# Altium PCB PCB2.PcbDoc
Units mil, origin at the board's own origin, x right, y up, seen from the top; angles counter-clockwise.
Board outline 3864.8 x 3433.56 mil, 2 copper layers (Top Layer, Bottom Layer); 117 components, 83 nets, 405 pads, 186 vias.
Unrouted connection lines stored in the file: 42.
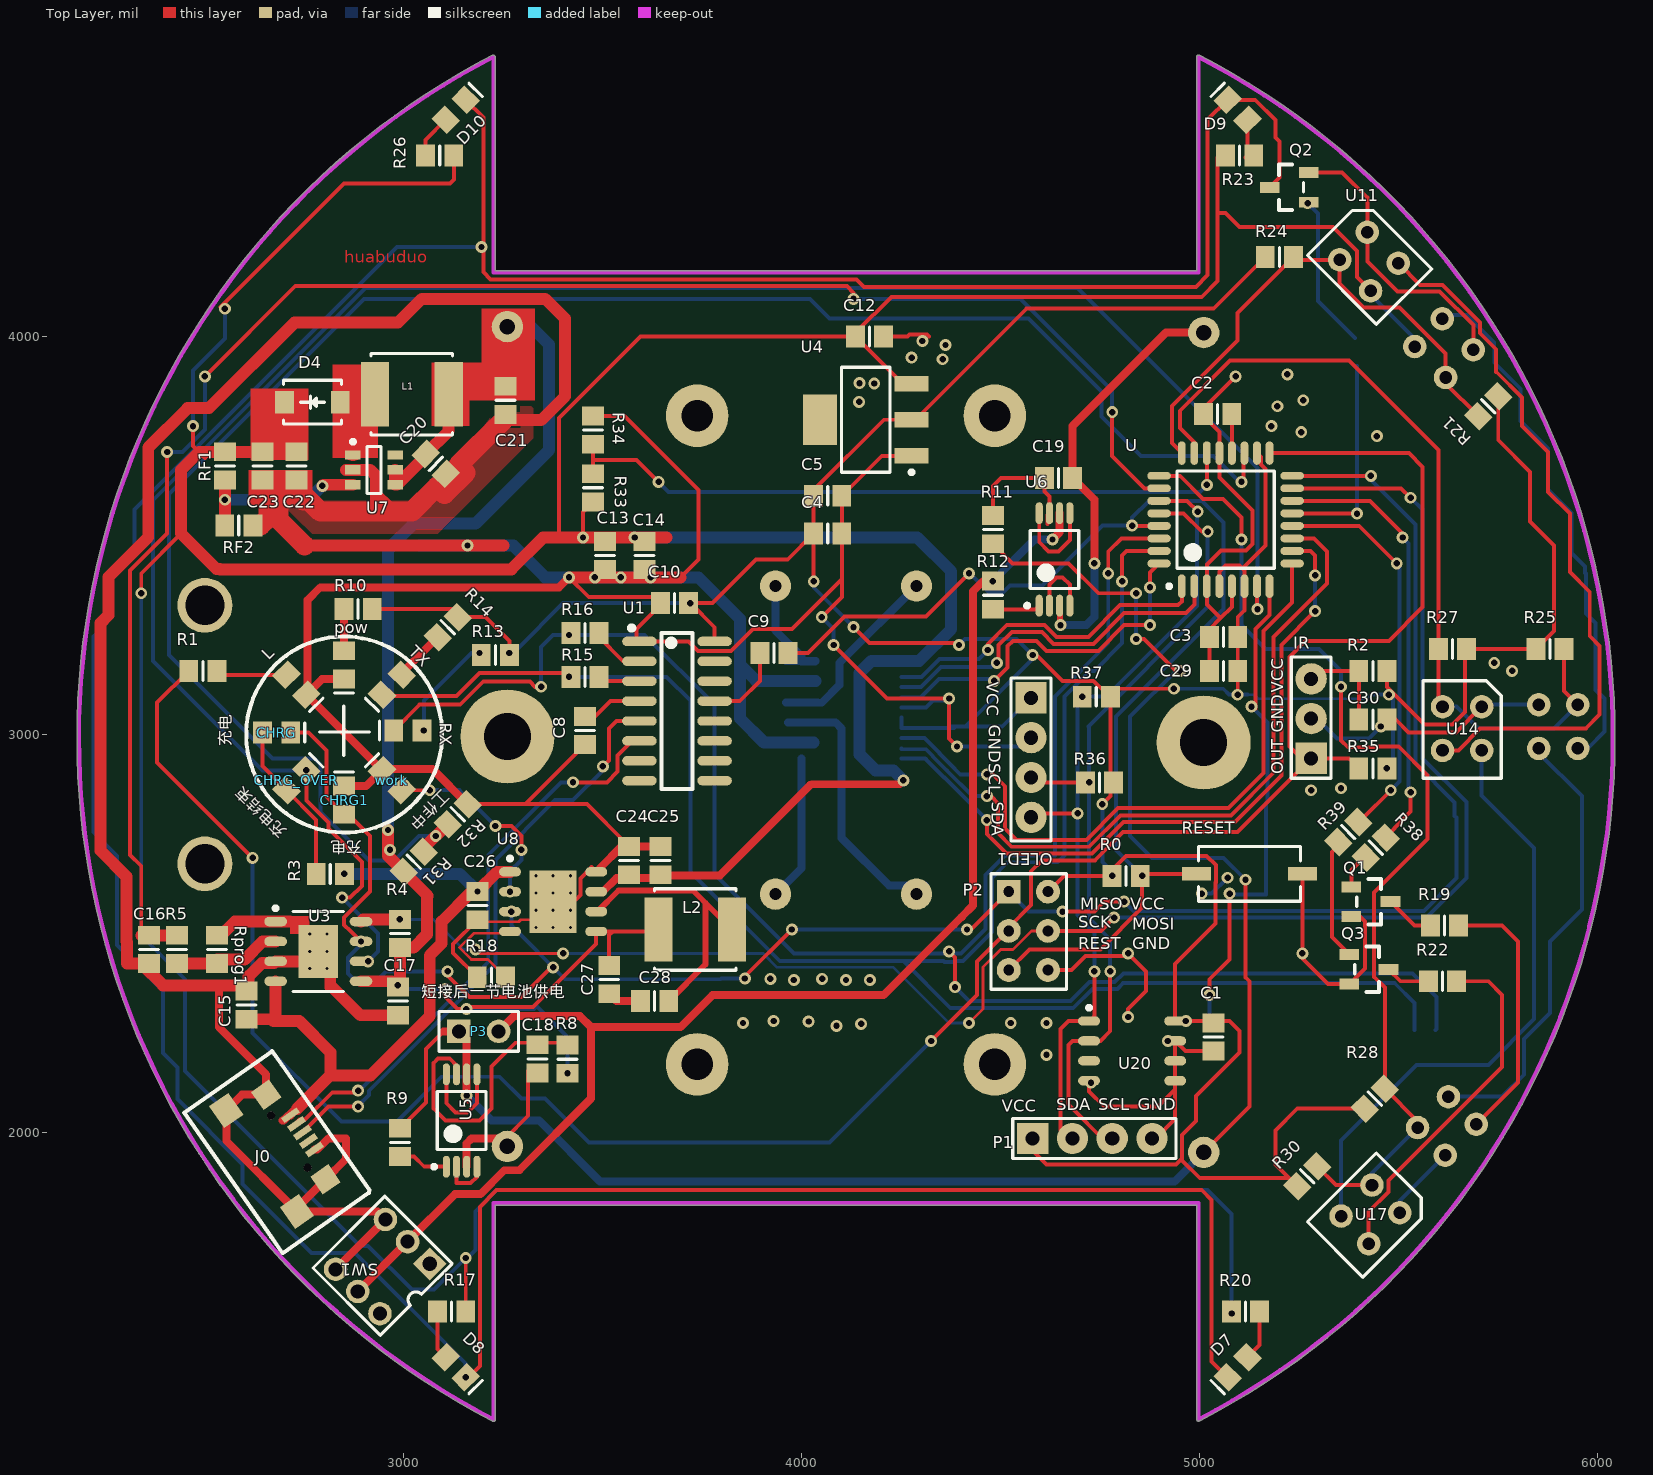
[diagram p0: Top Layer view]
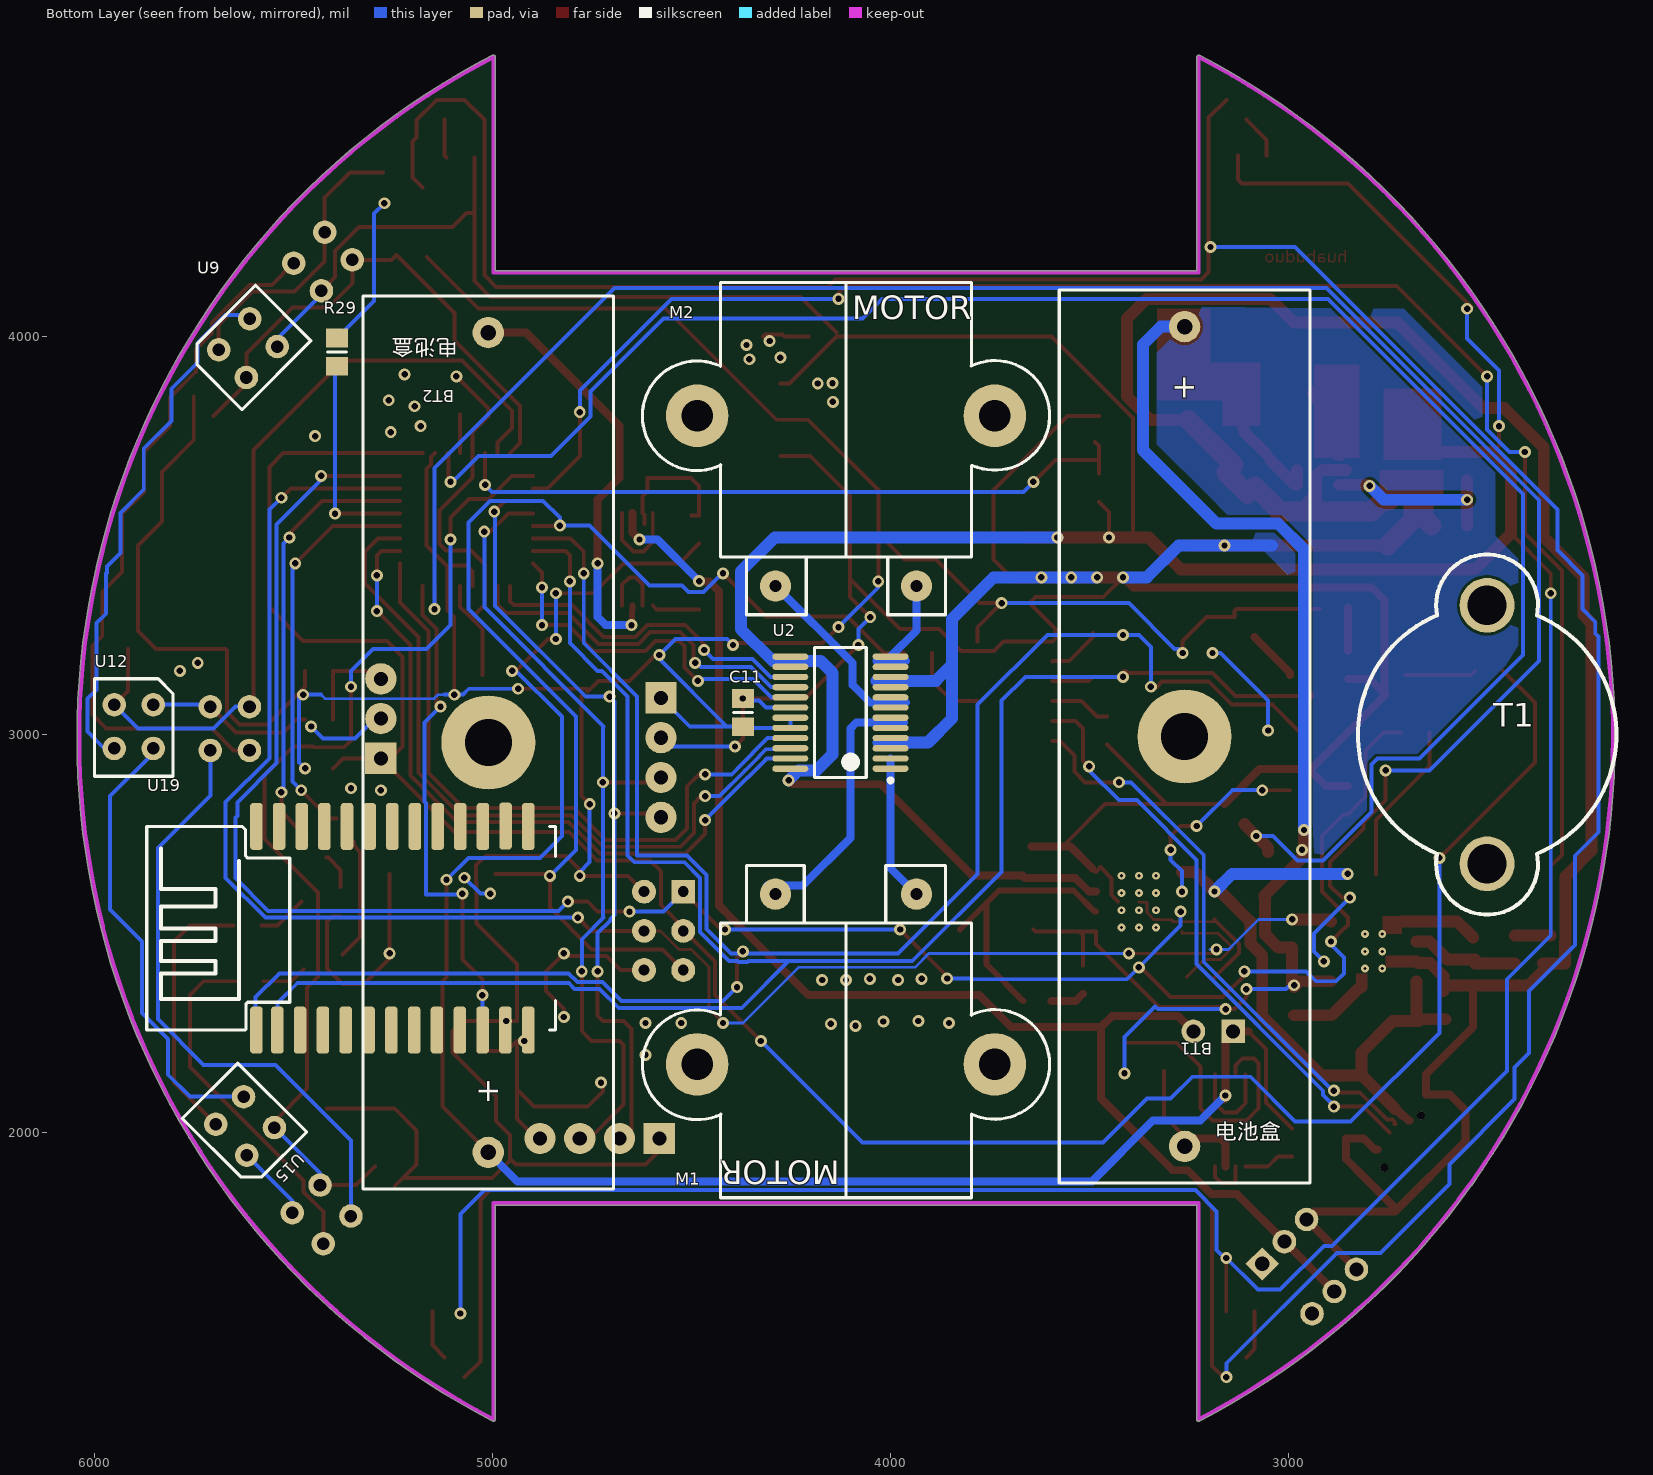
[diagram p1: Bottom Layer view, seen from below]

## Layer stack, top to bottom
Top Solder: solder mask 0.4, Solder Resist, Dk 3.5
Top Layer: signal copper 1.4
Dielectric 1: dielectric 12.6, FR-4, Dk 4.8
Bottom Layer: signal copper 1.4
Bottom Solder: solder mask 0.4, Solder Resist, Dk 3.5

## Board outline
3221.33,1275.58 ccw(c3225,1279) 3229.52,1276.82 3229.52,1276.83 ccw(c3225.13,1279.26) 3230.15,1279.26 ccw(c3225.13,1279.26) 3230.01,1280.41 3230.01,1817.65 4991.98,1817.65 4991.98,1279.69 ccw(c4997,1279.69) 4997.35,1274.69 ccw(c4997.7,1279.69) 5000.01,1275.24 ccw(c4110.98,2991) 6043.39,2991 ccw(c4110.98,2991) 4999.58,4706.98 ccw(c4997.27,4702.53) 4997.15,4707.54 ccw(c4997,4702.53) 4991.98,4702.53 4991.98,4166.02 3230.01,4166.02 3230.01,4701 ccw(c3225,4701) 3229.06,4703.94 ccw(c3224.32,4702.32) 3222.01,4706.77 ccw(c4111,2991)

## Design rules (kind name [scope] priority, off if disabled: settings)
Clearance [All] p1: gap=7
PolygonConnect [All] p1: connectstyle=Relief reliefconductorwidth=10 reliefentries=4 polygonreliefangle="90 Angle" airgapwidth=10
RoutingVias [All] p1: holewidth=28 width=50 viastyle="Through Hole" minholewidth=28 minwidth=50 maxholewidth=28 maxwidth=50
SolderMaskExpansion [All] p1: expansion=4
Width [All] p1: maxlimit=100 minlimit=6 preferedwidth=20
30 further rules are at their usual default settings.

## Components (designator, comment, footprint, x,y, rotation, side; value= is the part's Value field where it differs from the comment)
BT1 "BAT" 电池盒_一节 3260,2995 r270 bottom locked
BT2 "BAT" 电池盒_一节 5010,2980 r90 bottom locked
C1 "Cap" 6-0805_N 5035,2240 r90 top
C2 "Cap" 6-0805_N 5045,3805 r180 top
C3 "Cap" 6-0805_N 5060,3245 r0 top
C4 "Cap Pol3" 6-0805_N 4065,3505 r0 top
C5 "Cap" 6-0805_N 4065,3600 r180 top
C8 "Cap" 6-0805_N 3455,3010 r90 top
C9 "Cap" 6-0805_N 3930,3205 r0 top
C10 "Cap" 6-0805_N 3680,3330 r0 top
C11 "Cap" 6-0805_N 4370,3055 r270 bottom
C12 "Cap Pol3" 6-0805_N 4170,4000 r0 top
C13 "Cap" 6-0805_N 3505,3450 r270 top
C14 "Cap" 6-0805_N 3605,3450 r90 top
C15 "Cap" 6-0805_N 2605,2320 r90 top
C16 "Cap" 6-0805_N 2360,2460 r90 top
C17 "Cap" 6-0805_N 2985,2330 r90 top
C18 "Cap" 6-0805_N 3336,2185 r90 top
C19 "Cap" 6-0805_N 4645,3645 r180 top
C20 "Cap" 6-0805_N 3080,3680 r135 top
C21 "Cap" 6-0805_N 3255,3839.92 r90 top
C22 "Cap" 6-0805_N 2730,3675 r90 top
C23 "Cap" 6-0805_N 2645,3675 r90 top
C24 "Cap" 6-0805_N 3566,2683 r90 top
C25 "Cap" 6-0805_N 3645,2683 r90 top
C26 "Cap" 6-0805_N 3185,2570 r90 top
C27 "Cap" 6-0805_N 3516,2384 r90 top
C28 "16V" 6-0805_N 3630,2330 r0 top
C29 "Cap" 6-0805_N 5060,3160 r0 top
C30 "Cap" 6-0805_N 5435,3037.5 r180 top
CHRG "LED" LED_0805 2680,3005 r0 top
CHRG1 "LED" LED_0805 2850,2835 r90 top
CHRG_OVER "LED" LED_0805 2730,2885 r45 top
D4 "SS34F" "SS34F - DIOM3426X12N" 2770,3835 r0 top
D7 "LED" LED_0805 5095,1410 r225 top
D8 "LED" LED_0805 3130,1410 r315 top
D9 "LED" LED_0805 5095,4570 r135 top
D10 "LED" LED_0805 3130,4570 r45 top
IR "IR" HDR1X3 5280,2940 r90 top (schematic designator U18)
J0 "USB_MINI" MICRO_USB 2745,2000 r305 top locked
L "LED" LED_0805 2730,3125 r315 top
L1 "2.5A" IND_5020 3020,3855 r180 top locked
L2 "2A" IND_5020 3732,2510 r180 top
M1 "Motor" MOTOR1 4111,2146 r180 bottom locked
M2 "Motor" MOTOR1 4111,3826 r0 bottom locked
OLED1 "OLED" HDR1X4 4576,3092 r270 top
P1 "I2C接口" HDR1X4 4580,1985 r0 top
P2 "Header 3X2" HDR2X3 4520,2605 r0 top
P3 "Header 2" HDR1X2 3138,2254 r0 top
pow "LED" LED_0805 2850,3175 r270 top
Q1 "MOSFET-N" SOT-23 5430,2580 r180 top
Q2 "MOSFET-N" SOT-23 5225,4375 r0 top
Q3 "MOSFET-N" SOT-23 5425,2410 r180 top
R0 "Res1" 6-0805_N 4815,2645 r180 top
R1 "Res1" 6-0805_N 2495,3160 r180 top
R2 "Res1" 6-0805_N 5435,3160 r0 top
R3 "Res1" 6-0805_N 2815,2650 r180 top
R4 "Res1" 6-0805_N 2990,2500 r90 top
R5 "Res1" 6-0805_N 2430,2460 r270 top
R8 "Res1" 6-0805_N 3411,2184 r90 top
R9 "Res1" 6-0805_N 2990,1975 r270 top
R10 "Res1" 6-0805_N 2885,3315 r0 top
R11 "Res1" 6-0805_N 4480,3515 r270 top
R12 "Res1" 6-0805_N 4480,3350 r270 top
R13 "Res1" 6-0805_N 3230,3200 r180 top
R14 "Res1" 6-0805_N 3110,3270 r225 top
R15 "Res1" 6-0805_N 3455,3145 r0 top
R16 "Res1" 6-0805_N 3455,3255 r0 top
R17 "Res1" 6-0805_N 3120,1550 r0 top
R18 "Res1" 6-0805_N 3220,2390 r0 top
R19 "Res1" 6-0805_N 5615,2520 r0 top
R20 "Res1" 6-0805_N 5115,1550 r180 top
R21 "Res1" 6-0805_N 5725,3825 r45 top
R22 "Res1" 6-0805_N 5610,2380 r0 top
R23 "Res1" 6-0805_N 5100,4455 r180 top
R24 "Res1" 6-0805_N 5200,4200 r180 top
R25 "Res1" 6-0805_N 5880,3215 r180 top
R26 "Res1" 6-0805_N 3090,4455 r0 top
R27 "Res1" 6-0805_N 5635,3215 r0 top
R28 "Res1" 6-0805_N 5440,2085 r225 top
R29 "Res1" 6-0805_N 5390,3961 r270 bottom
R30 "Res1" 6-0805_N 5270,1890 r225 top
R31 "Res1" 6-0805_N 3025,2680 r225 top
R32 "Res1" 6-0805_N 3135,2800 r225 top
R33 "Res1" 6-0805_N 3475,3620 r270 top
R34 "Res1" 6-0805_N 3475,3765 r270 top
R35 "Res1" 6-0805_N 5435,2915 r0 top
R36 "Res1" 6-0805_N 4748,2879 r0 top
R37 "Res1" 6-0805_N 4740,3095 r0 top
R38 "Res1" 6-0805_N 5442,2716 r45 top
R39 "Res1" 6-0805_N 5373,2755 r45 top
RESET "SW-PB" KEY_SODFL_2-Leads 5125,2650 r180 top
RF1 "Res1" 6-0805_N 2550,3675 r90 top
RF2 "Res1" 6-0805_N 2585,3525 r180 top
Rprog1 "500mA" 6-0805_N 2530,2460 r270 top
RX "LED" LED_0805 3010,3010 r180 top
SW1 "SW" KEY_ZS_5.8*5.8 3065,1670 r225 top
T1 "3PI万向轮" 万向轮 2500,3000 r90 bottom locked
TX "LED" LED_0805 2970,3125 r225 top
U "ATMEL328P" "TQFP 32" 5065,3540 r90 top
U1 "CH340G" SOP16 3710,2935 r0 top
U2 "TB6612FNC" TB6612FNG 4125,3055 r0 bottom
U3 "TC4056A" TC4056A 2785,2455 r0 top
U4 "ASM1117-5V" SOT-223 4135.63,3766 r90 top
U5 "DW03D" TSOP8 3145,2030 r90 top
U6 "DW03D" TSOP8 4635,3440 r90 top
U7 "ME2159AM6G" SOT-23-6 2925,3665 r0 top
U8 "FM9836C" SOP8 3375,2580 r0 top
U9 "ITR" DIP4 5540,3975 r315 bottom
U11 "ITR" DIP4 5429.25,4115 r135 top
U12 "ITR" DIP4 5950,2965 r90 bottom
U14 "ITR" DIP4 5610,2960 r90 top
U15 "ITR" DIP4 5625,2090 r225 bottom
U17 "ITR" DIP4 5355,1790 r45 top
U19 "Bluetooth" HC-08 5195,2520 r90 bottom locked
U20 "LM75AD" "SOP8 - noHotPad" 4830,2205 r0 top
work "LED" LED_0805 2970,2885 r135 top (schematic designator WORK)

## Footprints (in the part's own frame and the unit in brackets; to place one, negate y for a bottom-side part, rotate by r counter-clockwise, add the part's x,y. Pads: shape width x height; smd on the part's side, far side on the other; paste and mask are expansions set on the pad)
6-0805_N [mm] "Chip Resistor, Body 2.0x1.2mm, IPC Medium Density"
  rect 1.2x1.4 smd: 1(-0.9,0) 2(0.9,0)
  silkscreen extent 0,-0.6 0,0.6, body extent -1.07,-0.7 1.07,0.7, height 0.7
DIP4 [mm]
  round 1.5 hole 0.8: 1(0,0) 2(0,-2.5) 3(2.794,-2.5) 4(2.794,0)
  silkscreen extent -1.78,-3.75 4.45,1.25
HC-08 [mm]
  rrect50% 3x0.8 smd: 1(-6.675,10.1) 2(-6.675,8.765) 3(-6.675,7.309) 4(-6.675,5.853) 5(-6.675,4.398) 6(-6.675,2.942) 7(-6.675,1.486) 8(-6.675,0.03) 9(-6.675,-1.426) 10(-6.675,-2.882) 11(-6.675,-4.338) 12(-6.675,-5.794) 13(-6.675,-7.25) 14(6.325,-7.25) 15(6.35,-5.804) 16(6.325,-4.358) 17(6.325,-2.913) 18(6.325,-1.467) 19(6.325,-0.021) 20(6.325,1.425) 21(6.325,2.871) 22(6.325,4.317) 23(6.325,5.762) 24(6.325,7.208) 25(6.325,8.654) 26(6.325,10.1)
  Top Layer pour cut-out: -6.7,17.05 -6.725,17.025 -6.725,6.45 6.375,6.45 6.3,6.525 6.3,17.05
  Bottom Layer pour cut-out: -6.7,17.075 -6.725,17.05 -6.725,6.45 6.3,6.45 6.325,6.475 6.325,17.1
  Top Overlay keep-out lines w0.2: 4.3,10.65 4.45,10.8 6.125,10.8 6.325,11 6.325,17.1 -6.675,17.1 -6.675,10.825 -6.625,10.775 -5.025,10.775 -4.9,10.65 -4.9,7.975 4.3,7.975 4.3,10.675
  silkscreen extent -6.68,-9 6.33,17.1, body extent -6.57,-9.1 6.43,17, height 1.6
HDR1X2 [mm] "Connector; Header; 2 Position"
  rect 1.5x1.5 hole 0.9: 1(0,0)
  round 1.5 hole 0.9: 2(2.54,0)
  silkscreen extent -1.27,-1.27 3.81,1.27
HDR1X3 [mm]
  rect 2x2 hole 0.9: 1(0,0)
  round 2 hole 0.9: 2(2.54,0) 3(5.08,0)
  silkscreen extent -1.27,-1.27 6.48,1.27
HDR1X4 [mm]
  rect 2x2 hole 0.9: 1(0,0)
  round 2 hole 0.9: 2(2.54,0) 3(5.08,0) 4(7.62,0)
  silkscreen extent -1.27,-1.27 9.14,1.27
HDR2X3 [mm]
  rect 1.524x1.524 hole 0.7: 1(0,0)
  round 1.524 hole 0.7: 2(2.5,0) 3(0,-2.5) 4(2.5,-2.5) 5(0,-5) 6(2.5,-5)
  silkscreen extent -1.14,-6.22 3.68,1.14
IND_5020 [mm] "Precision Wire Wound Inductor, 2-Leads, Body 5.00x5.00mm, IPC Medium Density"
  rect 1.8x4.1 smd: 1(-2.35,0) 2(2.35,0)
  silkscreen extent -2.6,-2.6 2.6,2.6, body extent -2.6,-2.5 2.6,2.5, height 2.1
KEY_SODFL_2-Leads [mm] "SODFL, 2-Leads, Body 3.25x8.00mm, IPC Medium Density"
  rect 1.85x0.85 smd: 1(-3.375,0) 2(3.375,0)
  silkscreen extent -3.25,-1.75 3.25,1.75, body extent -4,-1.8 4,1.91, height 2.5
KEY_ZS_5.8*5.8 [mm]
  rect 1.5x1.5 hole 0.9: 1(0,0)
  round 1.5 hole 0.9: 2(0,-2) 3(0,-4) 4(4.5,-4) 5(4.5,-2) 6(4.5,0)
  silkscreen extent -1.02,-5.08 5.46,1
LED_0805 [mm] "Chip LED  Body 2.0x1.2mm, IPC Medium Density"
  rect 1.2x1.4 smd: 1(-0.9,0) 2(0.9,0)
  silkscreen extent 1.8,-0.6 1.8,0.6, body extent -1.07,-0.7 1.07,0.7, height 0.7
MICRO_USB [mm]
  round 0.5 hole 0.5: 0(-2.032,-1.016) 0(2.032,-1.016)
  rect 0.4x1.2 smd: 1(-1.333,0) 2(-0.667,0) 3(0,0) 4(0.667,0) 5(1.333,0)
  rect 1.4x1.4 smd: 6(-3.302,-0.508) 7(3.302,-0.508)
  rect 1.7x1.5 smd: 8(-3.937,-3.175) 9(3.937,-3.175)
  silkscreen extent -5.36,-5.46 5.59,1.4, body extent -4.4,-5.72 4.4,0.02, height 2.71
MOTOR1 [mm]
  round 2 hole 0.762: 1(-4.5,11.5) 2(4.5,11.5)
  round 4 hole 2: 3(-9.5,0.635) 4(9.5,0.635)
  silkscreen extent -13,-7.87 13,13.33
SOP8 [mm] "SOP, 8-Leads, Body 4.90x3.90mm, Pitch 1.27mm, Thermal Pad 4.50x3.40mm, IPC Medium Density"
  oval 1.4x0.6 smd: 1(-2.75,1.905) 2(-2.75,0.635) 3(-2.75,-0.635) 4(-2.75,-1.905) 5(2.75,-1.905) 6(2.75,-0.635) 7(2.75,0.635) 8(2.75,1.905)
  rect 3x4 smd: 9(0,0)
  silkscreen extent -2.87,2.63 -2.62,2.88, body extent -3,-2.55 3,2.55, height 1.65
"SOP8 - noHotPad" [mm] "SOP, 8-Leads, Body 4.90x3.90mm, Pitch 1.27mm, Thermal Pad 4.50x3.40mm, IPC Medium Density"
  oval 1.4x0.6 smd: 1(-2.75,1.905) 2(-2.75,0.635) 3(-2.75,-0.635) 4(-2.75,-1.905) 5(2.75,-1.905) 6(2.75,-0.635) 7(2.75,0.635) 8(2.75,1.905)
  silkscreen extent -2.87,2.63 -2.62,2.88, body extent -3,-2.55 3,2.55, height 1.65
SOP16 [mm] "CH340G"
  oval 2.2x0.6 smd: 1(-3,7.595) 2(-3,6.325) 3(-3,5.055) 4(-3,3.785) 5(-3,2.515) 6(-3,1.245) 7(-3,-0.025) 8(-3,-1.295) 9(1.8,-1.295) 10(1.8,-0.025) 11(1.8,1.245) 12(1.8,2.515) 13(1.8,3.785) 14(1.8,5.055) 15(1.8,6.325) 16(1.8,7.595)
  silkscreen extent -3.65,-1.83 0.4,8.6, body extent -3.68,-1.78 2.51,8.13, height 1.7
SOT-23 [mm]
  rect 1.25x0.7 smd: 1(-1.25,0) 2(1.25,-0.95) 3(1.25,0.95)
  silkscreen extent -0.65,-1.46 0.9,1.46, body extent -1.5,-1.5 1.5,1.5, height 1.3
SOT-23-6 [mm] "SX1308"
  rect 1x0.6 smd: 1(-1.35,0.95) 2(-1.35,0) 3(-1.35,-0.95) 4(1.35,-0.95) 5(1.35,0) 6(1.35,0.95)
  silkscreen extent -1.47,-1.5 0.45,1.92, body extent -0.85,-1.5 0.85,1.5, height 1.1
SOT-223 [mm] "ASM1117,"
  rect 1x2.15 smd: 1(-1.665,-3.56) 2(0.635,-3.56) 3(2.935,-3.56)
  rect 3.25x2.15 smd: 4(0.635,2.29)
  silkscreen extent -2.84,-3.69 3.98,0.91, body extent -2.71,-4.28 3.99,3.02, height 1.7
"SS34F - DIOM3426X12N" [mm] "Molded Diode, 2-Leads, Body 3.45x2.60mm, IPC Medium Density"
  rect 1.2x1.45 smd: 1(-1.778,0) 2(1.778,0)
  silkscreen extent -1.85,-1.4 1.85,1.4, body extent -2.05,-1.4 2.05,1.4, height 1.25
TB6612FNG [mm]
  oval 2.3x0.4 smd: 1(-3.2,3.575) 2(-3.2,2.925) 3(-3.2,2.275) 4(-3.2,1.625) 5(-3.2,0.975) 6(-3.2,0.325) 7(-3.2,-0.325) 8(-3.2,-0.975) 9(-3.2,-1.625) 10(-3.2,-2.275) 11(-3.2,-2.925) 12(-3.2,-3.575) 13(3.2,-3.575) 14(3.2,-2.925) 15(3.2,-2.275) 16(3.2,-1.625) 17(3.2,-0.975) 18(3.2,-0.325) 19(3.2,0.325) 20(3.2,0.975) 21(3.2,1.625) 22(3.2,2.275) 23(3.2,2.925) 24(3.2,3.575)
  silkscreen extent -3.32,-4.15 1.65,4.45
TC4056A [mm] "SOP, 8-Leads, Body 4.90x3.90mm, Pitch 1.27mm, Thermal Pad 3.40x2.51mm, IPC Medium Density"
  oval 1.45x0.6 smd: 1(-2.725,1.905) 2(-2.725,0.635) 3(-2.725,-0.635) 4(-2.725,-1.905) 5(2.725,-1.905) 6(2.725,-0.635) 7(2.725,0.635) 8(2.725,1.905)
  rect 2.51x3.4 smd: 9(0,0)
  silkscreen extent -2.85,-2.55 1.6,2.88, body extent -3,-2.55 3,2.55, height 1.75
"TQFP 32" [mm] "ATMEL 328P"
  oval 1.5x0.5 smd: 1(-4.25,2.8) 2(-4.25,2) 3(-4.25,1.2) 4(-4.25,0.4) 5(-4.25,-0.4) 6(-4.25,-1.2) 7(-4.25,-2) 8(-4.25,-2.8) 17(4.25,-2.8) 18(4.25,-2) 19(4.25,-1.2) 20(4.25,-0.4) 21(4.25,0.4) 22(4.25,1.2) 23(4.25,2) 24(4.25,2.8)
  oval 0.5x1.5 smd: 9(-2.8,-4.25) 10(-2,-4.25) 11(-1.2,-4.25) 12(-0.4,-4.25) 13(0.4,-4.25) 14(1.2,-4.25) 15(2,-4.25) 16(2.8,-4.25) 25(2.8,4.25) 26(2,4.25) 27(1.2,4.25) 28(0.4,4.25) 29(-0.4,4.25) 30(-1.2,4.25) 31(-2,4.25) 32(-2.8,4.25)
  silkscreen extent -4.37,-3.1 3.1,3.72, body extent -4.57,-4.57 4.57,4.57, height 1.62
TSOP8 [mm] "TSOP, 8-Leads, Body 3.00x4.40mm, Pitch 0.65mm, IPC Medium Density"
  oval 1.4x0.45 smd: 1(-2.95,0.975) 2(-2.95,0.325) 3(-2.95,-0.325) 4(-2.95,-0.975) 5(2.95,-0.975) 6(2.95,-0.325) 7(2.95,0.325) 8(2.95,0.975)
  silkscreen extent -3.07,-1.55 1.85,1.87, body extent -3.2,-1.55 3.2,1.55, height 1.1
万向轮 [mm]
  round 3.5 hole 2.5: 1(-8.25,0) 2(8.25,0)
  silkscreen extent -11.5,-8.25 11.5,8.25
电池盒_一节 [mm]
  round 6 hole 3: 0(0,0)
  round 2 hole 1: 1(-26.162,0) 2(26.162,0)
  silkscreen extent -28.5,-8 28.5,8

## Part data
C1 C2 C3 C5 C8 C9 C10 C11 C13 C14 C15 C16 C17 C18 C19 C20 C21 C22 C23 C24 C25 C26 C27 C29 C30: "Capacitor"
C4 C12: "Polarized Capacitor (Surface Mount)"
C28: library part Cap, "Capacitor"
D4: "Schottky Diode"
IR: library part 红外一体化接收头
J0: "usb"
L1 L2: library part Inductor, "Inductor"
OLED1: "I2C OLED"
P1: library part "Header 4", "Header, 4-Pin"
P2: "Header, 3-Pin, Dual row"
P3: "Header, 2-Pin"
Q1 Q2 Q3: "N-Channel MOSFET"
R0 R1 R2 R3 R4 R5 R8 R9 R10 R11 R12 R13 R14 R15 R16 R17 R18 R19 R20 R21 R22 R23 R24 R25 R26 R27 R28 R29 R30 R31 R32 R33 R34 R35 R36 R37 R38 R39 RF1 RF2: "Resistor"
RESET: "Switch"
Rprog1: library part Res1, "Resistor"
SW1: "自锁开关"
U: library part ATMEL-328P
U3: "1A线性充电芯片"
U4: "ASM117"
U5 U6: "锂电池保护芯片"
U7: "锂电池升压芯片"
U9 U11 U12 U14 U15 U17: library part ITR20001/T
U19: "蓝牙模块"
U20: "温度传感器"

## Via types
v1: diameter 30, hole 16, Top Layer to Bottom Layer, 168 vias
v2: diameter 19.68, hole 7.87, Top Layer to Bottom Layer, 18 vias

## Nets (pads, with @x,y where several pads share a name; then routed paths per layer and width w, separated by ;. In a path a pad name is that pad's centre, name@x,y a point inside that pad or via, vN(x,y) a via of type N, cw(c..) or ccw(c..) an arc to the next point about the centre after c; other vN are vias at no path point)
+5: C1.2 C3.2 C4.1 C5.2 C10.2 C11.2 C29.2 OLED1.1 P1.1 P2.2 R0.2 R2.2 R10.2 R13.1 R14.1 R21.2 R24.2 R25.2 R27.2 R28.2 R30.2 R35.2 R36.2 R37.2 U1.16 U2.19 U2.20 U4.2 U19.12 U20.8 U.4 U.6 U.18 | length 10669.9
  Top Layer w10: R10.2 3130,3315 3135.05,3309.95 R14.1 3204.95,3295.05 3265.43,3234.57 R13.1 ; U1.16 3780.87,3269.57 3720.43,3330 3775,3330 3885,3440 3964.57,3440 C4.1 ; v1(4030,3385) 4029.57,3385.43 C4.1 ; v1(4130,3270) 4170,3230 4390,3230 v1(4395,3225) ; P1.1 4580,1955 4615,1920 4940,1920 4955,1935 4955,1994.02 4990,2029.02 4990,2091.42 5100,2201.42 5100,2255 5075,2280 v1(4965,2280) U20.8 4938.27,2423.27 5040,2525 5040,2627.75 5040.54,2628.3 5040.54,2671.7 5017.25,2695 4815,2695 4780,2660 v1(4780,2645) ; v1(4580,3200) 4580,3210 4655.44,3134.56 4733.16,3134.56 4760,3107.72 4760,3115 v1(4935,3115) ; P2.2 4658.43,2645 R0.2 ; v1(4755,2825) 4776,2846 4776,2972 ; 4775.43,2975 R37.2 ; 4955,1930 5000,1885 5224.89,1885 R30.2 5189.89,1920 5189.89,2004.89 5244.94,2059.94 R28.2 ; U.4 5049.25,3409.25 5065,3425 5100,3425 5112.24,3412.76 ; v1(5095,3100) 5095.43,3100.43 C29.2 C3.2 5095.43,3295.43 5112.24,3312.24 U.6 5112.24,3412.76 ; U.18 5153.39,3697.67 5153.39,3678.59 5165,3666.98 5165,3475 5112.24,3422.24 5112.24,3412.76 ; R24.2 5034.57,4070 4565,4070 4286,3791 U4.2 4206,3791 4029.57,3614.57 C5.2 C4.1 ; R2.2@5470,3160 5470,3120 5565,3025 5635,3025 5666.9,3056.9 5666.9,3211.46 R27.2 R25.2 5890,3260.43 5890,3475 5830,3535 5830,3660 5750.05,3739.95 R21.2
  Bottom Layer w7: 5120,3100 5136.06,3100 5145.93,3090.13 5420.13,3090.13 5430,3100
  Bottom Layer w10: v1(3265,3205) 3275,3215 3285,3215 3400,3330 v1(3720,3330) ; v1(4030,3385) 4030,3370 v1(4130,3270) ; U2.19 U2.20 C11.2@4382.05,3016.61 ; C11.2 4409.57,3019.57 ; v1(4395,3225) 4410,3240 4540,3240 v1(4580,3200) 4580,3190 4409.57,3019.57 ; OLED1.1 4503.57,3019.57 4409.57,3019.57 ; v1(4755,2825) 4755,2680 v1@4780,2655 ; v1(4935,3115) 4935,3119 4939,3115 5059,3115 5074,3100 v1(5095,3100) 5120,3100 ; 5430,3100 5485,3100 5485,2930 v1(5470,2915)
  other v1: 5475,3100
A0: R25.1 R27.1 U12.4 U14.4 U.23 | length 2107.9
  Top Layer w10: U.23 4986.26,3733.74 4950,3770 4950,3813.58 5076.42,3940 5375,3940 5599.57,3715.43 R27.1 5599.57,3080.43 U14.4 ; R25.1 5915.43,3109.57 U12.4
  Bottom Layer w10: U14.4 5645,3070 5700,3015 5890,3015 U12.4
A1: R21.1 R24.1 U9.4 U11.4 U.24 | length 1335.1
  Top Layer w10: U.24 4930,3732.09 4930,3825 5095,3990 5095,4059.57 R24.1 ; R24.1@5240.43,4205 5252.65,4192.78 U11.4 5351.46,4134.05 5412.05,4073.47 5501.53,4073.47 5617.78,3957.22 U9.4 5617.78,3882.11 R21.1
A2: R28.1 R30.1 U15.4 U17.4 U.25 | length 2579.7
  Top Layer w10: U.25 4949.76,3650.24 5008,3592 5058,3592 5105,3545 v1(5105,3490) ; R30.1 5342.33,1867.78 U17.4 ; v1(5355,3120) 5355,2985 5372,2968 5448,2968 5450,2970 5500,2970 5572.5,2897.5 5572.5,2737.5 5437.61,2602.61 5437.61,2391.25 5465.06,2363.8 R28.1 5547.22,2027.89 U15.4
  Bottom Layer w10: v1(5105,3490) 5105,3275 5165,3215 5300,3215 5355,3160 v1@5355,3125 ; U17.4 5432.78,1897.78 U15.4
A3: C16.2 R5.1 U.26 | length 4413.9
  Top Layer w10: C16.2@2340,2495.43 2340,2670 2312.27,2697.73 2312.27,3412.27 2405,3505 v1(2405,3710) ; v1(2500,3900) 2727,4127 4113,4127 4130,4110 v1(4130,4095) ; v1(4780,3810) 4780,3700 4861.26,3618.74 U.26
  Top Layer w30: C16.2@2340,2495.43 R5.1
  Bottom Layer w10: v1(2405,3710) 2443.18,3710 2500,3766.82 v1(2500,3900) ; v1(4130,4095) 4550,4095 4780,3865 v1(4780,3810)
A4: OLED1.4 P1.2 R37.1 U20.1 U.27 | length 2081.3
  Top Layer w10: OLED1.4 4586,2802 v1(4693,2802) ; P1.2@4680,1975 4650,2005 4650,2260 4670,2280 U20.1 4735,2293.27 v1(4735,2405) ; R37.1@4694,3095 v1(4705,3095) ; U.27 4967.76,3587.24 v1(4995,3560)
  Bottom Layer w10: v1(4735,2405) 4735,2500.96 4703,2532.96 4703,2537 4693,2547 v1(4693,2802) 4693,3083 v1(4705,3095) 4765,3095 4993,3323 4993,3551.18 4995,3553.18 v1(4995,3560)
A5: OLED1.3 P1.3 R36.1 U20.2 U.28 | length 2103.3
  Top Layer w10: OLED1.3 4588,2880 v1(4722,2880) ; P1.3@4767.5,1972.5 4670,2070 4670,2220 4680,2230 U20.2 4750,2230 4775,2255 v1(4775,2405) ; U.28 4959.25,3555.75 5005,3510 v1(5020,3510)
  Bottom Layer w10: v1(4775,2405) 4775,2485 4720,2540 4722,2542 v1(4722,2880) 4722,3018 4720,3020 5020,3320 v1(5020,3510)
A6: R31.1 R32.2 U.19 | length 4685.5
  Top Layer w10: v1@5110,3630 5110,3705.08 U.19
  Top Layer w30: R31.1 3050.05,2715.05 R32.2
  Bottom Layer w10: v1(3080,2745) 3038.18,2745 2976.18,2683 2912,2683 2790,2805 2790,2925 2775,2940 2670,2940 2410,3200 2410,3604.69 2900.31,4095 4020,4095 4070,4045 4570,4045 4753,3862 4753,3798.82 4851.82,3700 5035,3700 v1@5105,3630
  other v1: 5105,3635
A7: R33.1 R34.2 U.22 | length 1756.6
  Top Layer w10: R33.1 3475,3690 ; R34.2@3485,3734.57 3475,3724.57 3475,3690 ; v1(3640,3635) 3585,3690 3475,3690 ; U.22 v1(5017.76,3627.24) v1@5025,3620
  Bottom Layer w10: v1(3640,3635) 3665,3610 5000.51,3610 v1(5017.76,3627.24)
AN1: U2.21 U.9 | length 1704
  Top Layer w10: v1(4465,2900) 4480,2900 4510,2870 4510,2764.29 4539.29,2735 4715,2735 4795,2815 5072,2815 5160,2903 5160,3260 5232.32,3332.32 U.9
  Bottom Layer w10: U2.21 4308.02,2991.02 4346,2953.04 4346,2951.77 4371.77,2926 4372.08,2926 4398.08,2900 v1(4465,2900)
AN2: U2.22 U.11 | length 1872.8
  Top Layer w10: v1(4465,2845) 4475,2845 4493,2827 4493,2752 4527,2718 4722.04,2718 4801.04,2797 5078.04,2797 5185,2903.96 5185,3245 5320,3380 5320,3460 5287.24,3492.76 U.11
  Bottom Layer w10: U2.22 4250.98,2963 4312,2963 4329,2946 4329,2944.73 4364.73,2909 4365.04,2909 4429.04,2845 v1(4465,2845)
AREF: C2.1 U.20 | length 97.4
  Top Layer w10: U.20 C2.1@5080.75,3804.68
BAT_4.2V: BT1.1 C17.2 C20.2 C21.2 C27.2 L1.1 L2.2 R4.1 R8.1 R31.2 U3.5 U7.4 U7.5 U8.5 | length 3963.2
  Top Layer w10: C20.2@3045.43,3690.43 C20.2@3057.5,3702.5 ; v1(3105,2360) 3105,2340 3135,2310 v1(3157,2310) v1@3155,2310 ; v1@3150,2305 3160,2315 3325,2315 3483.27,2473.27 U8.5 3525,2505 ; C27.2 3516,2496 3525,2505 ; L2.2 3634.48,2505 3525,2505
  Top Layer w20: BT1.1 3300,3985 3300,3865.43
  Top Layer w30: U3.5 2970.43,2380 C17.2 2990,2370.43 R4.1 3024.57,2464.57 3058,2498 3058,2590.76 3060,2592.76 3060,2594.89 R31.2 2960,2694.89 v1(2960,2760) ; U7.5 U7.4 2982.6,3627.6 C20.2@3045.43,3690.43 ; C20.2 3112.52,3762.63 L1.1
  Bottom Layer w10: v1(2985,2370) 2990,2375 3005,2360 v1(3105,2360) ; v1(3157,2310) 3327,2310 3334,2317 3411,2240 v1(3411,2148.57)
  Bottom Layer w30: v1(2960,2760) 2960,3465 3025,3530 3180,3530 3365,3715 3365,3980 3320,4025 BT1.1
  other v1: 2965,2710
BN1: U2.17 U.32 | length 923.7
  Top Layer w10: v1(4483.18,3135) 4517,3168.82 4517,3222 4530.18,3235.18 4589.82,3235.18 4615,3210 4745,3210 4810,3275 4865,3275 v1@4875,3285 ; v1(4875,3370) 4875,3407.09 U.32
  Bottom Layer w10: U2.17 4298.39,3093.39 4345,3140 4478.18,3140 v1(4483.18,3135) ; v1(4875,3275) v1(4875,3370)
BN2: U2.16 U.2 | length 913.8
  Top Layer w10: v1(4490,3180) 4494.5,3184.5 4494.5,3224.5 4528,3258 4602.96,3258 4632.96,3228 4733,3228 4810,3305 4965,3305 4986.26,3326.26 U.2
  Bottom Layer w10: U2.16 4298.98,3118.98 4350,3170 4475,3170 4480,3175 v1@4480,3185
BOOST_6V: C12.1 C13.1 C14.2 C22.2 C23.2 C24.1 C25.1 D4.1 R17.2 R20.2 R23.2 R26.2 R33.2 RF1.2 U2.13 U2.14 U2.24 U4.3 U8.7 U9.1 U11.1 | length 13592.7
  Top Layer w10: v1(2340,3355) 2340,3405 2440,3505 ; v1(2470,3775) 2470,3725 2500,3695 ; v1@2538.79,4073.79 2850,4385 3115.43,4385 3125.43,4395 R26.2 ; R17.2 v1(3155.43,1684.57) ; 3390,3495 3390,3795 3595,4000 C12.1 4253.02,3881.55 U4.3 ; v1(3450,3495) 3450,3559.57 R33.2 ; C12.1@4135,4010 4225,4100 5005,4100 5044.57,4139.57 5044.57,4310 ; R23.2@5044.57,4450 5044.57,4310 ; U11.1 5395,4149.25 5395,4215 5335,4275 5100,4275 5065,4310 5044.57,4310
  Top Layer w20: U8.7 3500,2605 3534,2639 3661,2639 3668,2646 3794,2646 4021,2873 ; 4025,2875 4245,2875 v1(4255,2885)
  Top Layer w30: C23.2 RF1.2 2485.43,3710.43 2440,3665 2440,3505 2529.3,3415.7 2537.65,3415.7 2538.35,3415 3270,3415 3350,3495 3390,3495 ; 3395,3495 v1(3450,3495) v1(3580,3495) 3660,3495
  Bottom Layer w10: v1(2340,3355) 2340,2495 2450,2385 2450,2155 2890,1715 2910,1715 3020,1605 3075.87,1605 v1(3155.43,1684.57) 3155.43,1680.43 3180,1705 3180,1801.71 3233.29,1855 5020,1855 5080,1795 v1(5080,1545) ; v1(2470,3775) 2470,3915 2550,3995 v1(2550,4070) ; U11.1 5429.25,4105.75 U9.1@5550,3985
  Bottom Layer w30: v1(3580,3495) 4290,3495 4375,3410 4375,3265 4295,3185 4175,3185 4145,3155 4145,2950 4185.03,2909.97 4230.03,2909.97 v1(4255,2885)
CHRG: CHRG1.1 CHRG.2 P2.1 U3.7 U8.3 U.16 | length 5314.3
  Top Layer w10: CHRG.2 2760,3005 2805,2960 2805,2844.57 CHRG1.1 2860.43,2799.57 2915,2745 2915,2605 2850,2540 2850,2521.88 2865.69,2506.19 2866.09,2506.19 v1(2892.28,2480) ; v1(3110,2405) 3110,2395 3165,2340 3295,2340 3370,2415 v1(3375,2415) ; v1(3857,2387) 3857,2388 3855,2390 v1(3975,2510) ; v1(4415,2510) 4425,2510 P2.1 ; v1(4655,2555) 4735,2555 4760,2580 v1(4810,2580) ; U.16 v1@5430,3650.24
  Bottom Layer w10: v1(2892.28,2480) 2892.28,2472.28 2860,2440 2860,2400 2880,2380 2930,2380 2955,2405 v1(3110,2405) v1@3115,2405 ; v1(3270,2555) 3270,2520 3405,2385 3796,2385 3798,2387 v1(3857,2387) ; v1(3975,2510) v1(4415,2510) ; P2.1 4570,2555 v1(4655,2555) ; v1(4810,2580) 4833,2557 5562.96,2557 5645,2639.04 5645,2790.96 5640.48,2795.48 5640.48,2829.52 5542,2928 5542,3528 5430,3640 v1(5430,3650)
CHRG_EN: P2.4 R4.2 U3.8 U.15 | length 4437.5
  Top Layer w7: v1(3180,2460) 3190,2450 v1(3400,2450) ; v1(4420,2275) 4455.5,2310.5 4455.5,2415.5 4500,2460 4530.7,2460 4577.28,2506.57 P2.4
  Top Layer w10: P2.4 4751.57,2506.57 v1(4785,2540) ; U.15 5506.26,3618.74 v1(5530,3595)
  Top Layer w30: U3.8 2897.72,2535.43 v1(2990,2535.43)
  Bottom Layer w7: v1(2990,2535.43) 3074.57,2535.43 3150,2460 v1(3180,2460) 3196.5,2460 ; v1(3400,2450) 3903.08,2450 3938.08,2415 4230,2415 4370,2275 v1(4420,2275)
  Bottom Layer w10: v1(4785,2540) 5570,2540 5670,2640 5670,2830 5560,2940 5560,3565 v1(5530,3595)
D0/RXD: R16.1 RX.2 U19.1 U.30 | length 5011.5
  Top Layer w10: RX.2 2974.57,3010.43 3039,3074.86 3140.98,3074.86 3199.44,3133.32 3316.68,3133.32 3330,3120 v1(3345,3120) ; v1(4370,2455) 4385,2440 v1(4385,2365) ; v1(4770,3405) 4770,3460 4802.76,3492.76 U.30
  Bottom Layer w10: v1(3345,3120) 3345,3220 3375,3250 v1(3415,3250) 3605,3250 3780,3075 3780,2650 3980,2450 4400,2450 4461,2511 4461,2647.01 4510,2696.01 4636.01,2696.01 4636.01,3096.01 4770,3230 v1(4770,3405) ; v1(4385,2365) 4420,2330 4675,2330 4723.41,2378.41 ; 4723.82,2378 4786.18,2378 4808.18,2400 5535,2400 5595,2340 5595,2259.57 U19.1
D1/TXD: R15.1 TX.2 U19.2 U.31 | length 4855.7
  Top Layer w10: TX.2@2944.95,3096.86 3131.86,3096.86 3190,3155 R15.1@3409.57,3155 ; v1(4805,3385) 4805,3450 4816.26,3461.26 U.31
  Top Layer w20: TX.2@2944.95,3096.86 TX.2 ; R15.1@3409.57,3155 R15.1
  Bottom Layer w10: v1(3415,3145) 3660,3145 3720,3085 3720,2655 3944.5,2430.5 4356.32,2430.5 4358.82,2428 4381.18,2428 4383.68,2430.5 4404.54,2430.5 4478,2503.96 4478,2639.97 4517.04,2679.01 4643.05,2679.01 4660,2695.96 4660,3095.96 4724.04,3160 4735,3160 4805,3230 v1(4805,3385) ; 4255.48,2430.48 4372.96,2313 4682.04,2313 4730.04,2361 4793.23,2361 4807.23,2375 5490,2375 5540.09,2324.91 U19.2
D3: U2.15 U.1 | length 854.1
  Top Layer w10: v1(4467.5,3212.5) 4467.5,3227.5 4515,3275 4610,3275 4640,3245 4720,3245 4800,3325 4945,3325 4954.76,3334.76 U.1
  Bottom Layer w10: U2.15 4300.53,3144.57 4345.96,3190 4445,3190 v1(4467.5,3212.5)
D6: U2.23 U.10 | length 1805.4
  Top Layer w10: v1(4465,2785) 4465,2750 4514,2701 4729.08,2701 4808.08,2780 5088,2780 5205,2897 5205,3225 v1(5290,3310) ; U.10 5278.74,3461.26 5290,3450 v1(5290,3400)
  Bottom Layer w10: U2.23 4310.16,2939.84 4312,2938 4312,2937.69 4357.69,2892 4358,2892 v1(4465,2785) ; v1(5290,3310) v1(5290,3400)
D8: R39.2 U.12 | length 1002.1
  Top Layer w10: U.12 5400.75,3524.25 v1(5495,3430) ; R39.2@5391.05,2789.06 5409.06,2789.06 v1(5480,2860)
  Bottom Layer w10: v1(5480,2860) 5502,2882 5502,3423 v1(5495,3430)
D9: R29.2 U.13 | length 543.6
  Top Layer w10: U.13 5394.25,3555.75 v1(5395,3555) v1@5385,3555
  Bottom Layer w10: v1(5395,3555) R29.2@5395,3925.57
D10: R38.2 U.14 | length 1110
  Top Layer w10: U.14 5427.76,3587.24 5510,3505 v1(5510,3495) ; R38.2 5489.5,2763.5 5489.5,2765.5 5530,2806 v1(5530,2855)
  Bottom Layer w10: v1(5510,3495) 5525,3480 5525,2860 v1(5530,2855)
D13/SCK: IR.1 P2.3 R1.2 R35.1 U.17 | length 5974.9
  Top Layer w10: R1.2 2380,3080.43 2380,2930 v1(2620,2690) ; v1(4325,2230) 4440,2345 4440,2430 4516.57,2506.57 P2.3 4520,2515 4576.43,2571.43 4576.43,2656.43 4604,2684 4736.12,2684 4807.12,2755 5095,2755 IR.1 ; U.17 5525.24,3707.32 5560,3672.57 5560,3320 5475,3235 5265,3235 5225,3195 5225,2970 5255,2940 IR.1 ; R35.1 5374.57,2940 IR.1
  Bottom Layer w10: v1(2620,2690) 2620,2250 2842.85,2027.15 2982.15,2027.15 3095,2140 3240,2140 3295,2085 3355,2085 3465,1975 4070,1975 v1(4325,2230)
FB: RF1.1 RF2.2 U7.3 | length 452.2
  Top Layer w30: RF2.2 2550,3525.43 v1(2550,3590) RF1.1 ; v1(2795,3625) 2797.6,3627.6 U7.3
  Bottom Layer w30: v1(2550,3590) 2760,3590 v1(2795,3625)
GND: C1.1 C2.2 C3.1 C4.2 C5.1 C8.1 C10.1 C11.1 C12.2 C13.2 C14.1 C15.2 C16.1 C17.1 C20.1 C21.1 C22.1 C23.1 C24.2 C25.2 C26.1 C27.1 C28.1 C29.1 C30.1 CHRG1.2 IR.2 J0.5 J0.6 J0.7 J0.8 J0.9 L.2 OLED1.2 P1.4 P2.6 pow.2 Q1.3 Q2.3 Q3.3 R18.1 R32.1 R34.1 RESET.1 RF2.1 Rprog1.1 SW1.3 SW1.4 U1.1 U2.3 U2.4 U2.9 U2.10 U2.18 U3.1 U3.3 U4.1 U7.2 U8.8 U9.3 U11.3 U12.3 U14.3 U15.3 U17.3 U19.13 U20.4 U20.5 U20.6 U20.7 U.3 U.5 U.21 work.2 | length 19306.6
  Top Layer w7: C26.1 3185,2529.5 3288.53,2529.5 3293.6,2534.57 3322.45,2534.57 3322.45,2535.38 3337.5,2535.38 3354.66,2552.54 3354.66,2578.69 3373.69,2578.69 3375,2580
  Top Layer w10: R32.1 3305.49,2825.05 ; R18.1 3123.97,2450.6 3123.97,2473.54 C26.1 ; v1(3415,3395) 3465,3345 3634.57,3345 3649.57,3330 3585,3265.43 3585,3240.91 U1.1 3715.7,3234.02 3739.51,3210.2 3822.22,3210.2 3877.02,3265 3975,3265 4100.43,3390.43 ; 3427.54,2580 3443.71,2596.17 3443.71,2638.71 3471.63,2666.63 U8.8 U8.8@3492.13,2663.87 ; C8.1 3305.49,2825.05 ; R34.1 3554.57,3800.43 3740,3615 3740,3440 3695,3395 ; C24.2@3560,2725 3459.95,2825.05 3305.49,2825.05 ; v1@4058,3303 4100.43,3345.43 4100.43,3390.43 ; v1(4080,3225) 4214.57,3090.43 v1(4370,3090.43) 4370,2990 v1(4390,2970) ; C12.2 4265,4000 4270,4005 4315,4005 4320,4000 ; U4.1 4200.88,3700.45 C5.1 C4.2 4100.43,3390.43 ; P2.6 4678.15,2408.15 4713,2443 4813,2443 v1(4820,2450) 4865,2405 4865,2355 4820,2310 v1(4820,2290) ; U20.4 4721.73,2103.27 4760,2065 4895,2065 4938.27,2108.27 ; P1.4@4888.36,1976.64 4888.36,1983.36 4938.27,2033.27 4938.27,2108.27 ; C29.1@5024.57,3150 5024.57,3264.57 5052.66,3292.66 ; C1.1 4963.7,2204.57 U20.7 U20.6 U20.5 4938.27,2108.27 ; U.5 5080.75,3320.75 5052.66,3292.66 ; v1(5090,3900) 5009.57,3819.57 C2.2 5009.57,3800.43 5049.25,3760.75 U.21 5049.25,3645.75 5132,3563 5132,3478.82 5116.18,3463 5053,3463 5017.76,3427.76 U.3 5017.76,3327.24 5052.34,3292.66 5052.66,3292.66 ; RESET.1 5257.87,2437.13 5322.4,2372.6 Q3.3 5415,2411.81 5415,2530 5402.4,2542.6 Q1.3 ; Q2.3 5357.6,4412.4 5421.06,4348.94 U11.3 5421.06,4188.94 5497,4113 5602.96,4113 5687.38,4028.58 U9.3 ; IR.2 IR.2@5295,3040 ; C30.1 5492.5,3037.5 5525,3005 5643.43,3005 U14.3
  Top Layer w20: 2535,2369.57 2535,2265 2654.05,2145.95 J0.6 2593.45,2095.02 J0.8 2553.7,1979.14 J0.9 ; J0.5 2781.99,1956.99 2810,1985 2855,1985 2855,1933.86 J0.7 2731.51,1810.37 J0.9 ; SW1.4 SW1.3 2933.66,1801.34 J0.9 ; CHRG1.2 2905.32,2870.43 work.2 ; pow.2 2794.68,3139.57 L.2@2758.14,3103.03 ; R32.1 3071.97,2913.14 2944.94,2913.14 work.2 ; v1(3415,3395) 3390,3370 2790,3370 2758.14,3338.14 L.2@2758.14,3103.03 ; U8.8@3492.13,2663.87 3546.7,2718.43 C24.2 C25.2 ; C27.1 3534.57,2330 C28.1 ; L.2@2758.14,3103.03 L.2 work.2
  Top Layer w30: C16.1 C16.1@2340,2424.57 ; Rprog1.1@2535,2490 2575,2530 U3.1 2713.59,2530 ; C15.2@2610,2355 C15.2@2610,2375 ; 2713.59,2430 U3.3 2674.05,2426.34 2643.66,2426.34 2610,2392.67 C15.2@2610,2375 ; C22.1 2745.43,3639.57 C22.1@2749.89,3631.48 ; 2750,3475 3250,3475 ; 2815,2366.07 2818.93,2366.07 2890.43,2294.57 C17.1 ; U7.2@2855,3665 2915,3665 2930,3650 2930,3560 ; C21.1@3250,3790 3345,3790 3405,3850 3405,4045 3355,4095 3045,4095 2985,4035 2725,4035 2510,3820 2456.36,3820 2357.59,3721.23 2357.59,3495.77 2257.36,3395.54 2257.36,3299.7 2238,3280.34 2238,2707.96 2303,2642.96 2303,2480.11 2304.57,2478.54 2304.57,2424.57 C16.1@2340,2424.57 ; v1(3415,3395) v1(3480,3395) v1(3545,3395) v1(3620,3395) 3695,3395 ; C16.1@2340,2424.57 2395,2369.57 2535,2369.57 2604.57,2369.57 C15.2@2610,2375
  Top Layer w50: RF2.1@2640,3525 2660,3545 2660,3600 ; 2685,3610 2685,3540 2750,3475 ; 2720,3615 2747.5,3587.5 ; 2735,3615 2790,3560 2930,3560 3020,3560 3083.44,3623.44 ; 3102.27,3604.61 3155.39,3657.73 ; 3136.56,3676.56 C21.1@3250,3790
  Bottom Layer w10: v1(4050,3295) 4080,3265 v1(4080,3225) ; U2.18 4312.2,3067.8 4329.41,3085 C11.1@4370,3085 ; v1(4390,2970) 4554,2970 OLED1.2 ; v1(5005,2600) 5030,2600 v1(5070,2640) ; IR.2 5295,3040 5345,2990 5425,2990 v1(5455,3020) ; U17.3 5502.38,1828.18 U15.3 ; U14.3 5713.43,3075 U12.3
  Bottom Layer w30: 3040,3475 3275,3475 3355,3395 v1(3415,3395) ; v1(3480,3395) v1(3545,3395) v1(3620,3395) 3740,3395 3845,3290 3845,3175 ; 4030,2980 3905,2980 3845,3040 3845,3175 ; 4035,3135 3885,3135 3845,3175
  other v1: 4726.73,2125 4615,2195 4920,2230 4087,2268 4149,2273 3852,2275 4525,2275 4615,2275 4017,2279 3929,2280 3980,2383 4111,2383 4171,2383 3921,2386 4051,2386 5257.87,2450 5280,2860 5355,2865 5785,3160 5740,3180 3160,3475 5445,3750 5255,3760 5180,3775 5195,3825 4144,3836 5260,3840 4182,3882 4145,3883 5220,3905 4354,3943 4276,3947 4361,3979 4303,3989
NetBT1_2: BT1.2 C18.1 U5.3 | length 354.4
  Top Layer w10: BT1.2@3255,1985 3312,2042 C18.1@3312,2154.57
  Top Layer w20: U5.3 3157.8,1972.8 3170,1985 BT1.2@3255,1985
NetBT2_1: BT2.1 P3.1 R9.1 R11.2 U5.6 | length 4692.5
  Top Layer w10: R9.1 3055,2075.43 3055,2210 3099,2254 ; R11.2 4529.57,3430 4670,3430 4745,3355 v1(4840,3355) ; v1(4840,3240) 4860,3240 4940,3160 v1(4950,3160) ; BT2.1 5067.53,2007.53 5125,2065 5125,2380 5115,2390 v1(5115,2635)
  Top Layer w20: 3099,2254 P3.1 3157.8,2234.2 v1(3157.8,2092.8) 3157.8,2086.09 v1@3161.39,2082.5
  Bottom Layer w10: v1(4840,3240) v1(4840,3355) ; v1@4945,3165 4825,3045 4825,2745 4880,2690 5060,2690 v1(5115,2635)
  Bottom Layer w20: v1(3157.8,2092.8) 3220.59,2030 3340,2030 3493,1877 4937,1877 4950,1890 BT2.1
NetBT2_2: BT2.2 C19.1 U6.3 | length 1072
  Top Layer w15: U6.3 v1(4650,3275)
  Top Layer w20: v1(4735,3430) 4735,3590.43 C19.1 4680.43,3775.43 4915,4010 BT2.2
  Bottom Layer w20: v1(4650,3275) 4715,3275 4735,3295 v1(4735,3430)
NetC8_2: C8.2 U1.4 | length 152.9
  Top Layer w10: C8.2 3480.43,3045.43 3519.02,3084.02 U1.4
NetC9_1: C9.1 U1.13 | length 205.1
  Top Layer w10: U1.13 3844.02,3084.02 3894.57,3134.57 C9.1
NetC18_2: C18.2 R8.2 U5.7 | length 697.4
  Top Layer w10: U5.7 3132.2,2168.75 3115.25,2185.7 3085.7,2185.7 3075,2175 3075,2060 3105,2030 3190,2030 3220,2060 3220,2165.43 3280,2225.43 R8.2@3411,2225.43
NetC19_2: C19.2 R11.1 U6.7 | length 355.4
  Top Layer w10: R11.1@4499.57,3550.43 R11.1 4480,3625 4500,3645 C19.2 4609.57,3610.43 4622.2,3597.8 U6.7 4617.47,3551.41 4617.47,3528.8
NetC28_2: C28.2 L2.1 U8.6 | length 688.7
  Top Layer w15: U8.6 3486.23,2555 3539.23,2608 3726.52,2608 3758,2576.52 ; C28.2 3758,2422.57 3758,2576.52 ; L2.1 3758,2576.52
NetC30_2: C30.2 IR.3 R2.1 | length 250.4
  Top Layer w10: IR.3 5300,3160 R2.1 C30.2
NetCHRG_1: CHRG.1 CHRG_OVER.1 R3.2 | length 410.9
  Top Layer w10: CHRG.1 2644.57,2920.32 CHRG_OVER.1 2779.57,2785.32 R3.2
NetD4_2: D4.2 L1.2 U7.1 | length 203.7
  Top Layer w50: U7.1@2871.85,3712 2860,3723.85 2860,3835 2907.48,3835 L1.2
NetD7_1: D7.1 R20.1 | length 127.5
  Top Layer w10: D7.1 5150.43,1465.43 R20.1
NetD7_2: D7.2 D8.2 D9.2 D10.2 Q2.1 | length 9690.8
  Top Layer w10: D8.2 3162.94,1384.94 3191.06,1413.06 3191.06,1812.76 3233.29,1855 5005,1855 5030,1830 5030,1424.89 D7.2 ; D10.2 3200,4550.11 3200,4161.96 3217.96,4144 4137.04,4144 4156.04,4125 4990,4125 5020,4155 5020,4545.11 D9.2 5139.38,4595.05 5190,4544.43 5190,4500 5200,4490 5200,4399.21 Q2.1
  Bottom Layer w10: v1(3155,1385) 3155,1420 2877.39,1697.61 2767.39,1697.61 2595,1870 2595,1920 2430.98,2084.02 2430.98,2163.21 2395,2199.19 2395,2355 2279.02,2470.98 2279.02,2695.38 2220,2754.39 2220,3245.79 2228.15,3253.93 2228.15,3283.15 2260,3315 2260,3400 2323.14,3463.14 2323.14,3565.92 2982.23,4225 v1(3195,4225) v1@3195,4235
NetD8_1: D8.1 R17.1 | length 123.4
  Top Layer w10: R17.1 3084.57,1455.43 D8.1
NetD9_1: D9.1 R23.1 | length 96.9
  Top Layer w10: R23.1@5115.43,4450 5120.05,4454.62 D9.1
NetD10_1: D10.1 R26.1 | length 110.8
  Top Layer w10: R26.1 3054.57,4494.57 D10.1
NetL_1: L.1 R1.1 | length 178.6
  Top Layer w10: R1.1 2540.38,3150.05 L.1
NetM1_1: M1.1 U2.5 U2.6 | length 706.6
  Bottom Layer w20: 3965,3030 4085,3030 4100,3015 4100,2740 4219.41,2620.59 4310,2620.59 M1.1
NetM1_2: M1.2 U2.1 U2.2 | length 368.1
  Bottom Layer w20: M1.2 3999.02,2663.94 U2.1 U2.2
NetM2_1: M2.1 U2.11 U2.12 | length 316
  Bottom Layer w20: M2.1 3933.83,3260.93 U2.12 ; 3960,3185 4035,3185 4033.66,3183.66 3999.02,3183.66
NetM2_2: M2.2 U2.7 U2.8 | length 523.1
  Bottom Layer w20: 3960,3080 4040,3080 4039.89,3079.89 ; 3999.02,3079.89 4039.89,3079.89 ; M2.2 4095,3180.08 4095,3125 4049.89,3079.89 4039.89,3079.89
NetP3_2: P3.2 R12.1 SW1.2 SW1.5 U6.6 | length 3430.5
  Top Layer w20: SW1.5 SW1.2 3128.64,1845 3192.18,1845 3252.18,1905 3290,1905 3470,2085 3470,2265 ; P3.2 3277,2293 3442,2293 3470,2265 ; v1(4480,3385.43) 4480,3385 4455,3385 4430,3360 4430,2570 4402,2542 4401.75,2542 4383,2523.25 4383,2523 4205,2345 3775.59,2345 3695.59,2265 3470,2265 ; v1(4630,3490) 4647.8,3507.8 U6.6
  Bottom Layer w20: v1(4480,3385.43) 4584.57,3490 v1(4630,3490)
Netpow_1: pow.1 R10.1 | length 109.1
  Top Layer w20: pow.1 R10.1@2850,3319.57
NetQ1_1: Q1.1 R19.1 | length 125.2
  Top Layer w10: Q1.1 5539.21,2520 R19.1
NetQ1_2: Q1.2 R38.1 | length 91.4
  Top Layer w10: Q1.2 5380.79,2659.79 5411.95,2690.95 R38.1
NetQ2_2: Q2.2 R29.1 | length 387.9
  Bottom Layer w10: v1(5271,4335) 5297,4309 5297,4089.43 R29.1
NetQ3_1: Q3.1 R22.1 | length 112.8
  Top Layer w10: Q3.1 5504.21,2380 R22.1
NetQ3_2: Q3.2 R39.1 | length 307.3
  Top Layer w10: R39.1 5347.94,2720.95 5332,2705 5332,2491.19 Q3.2
NetR5_2: R5.2 Rprog1.2 U3.2 | length 266.5
  Top Layer w30: R5.2 Rprog1.2 ; Rprog1.2@2530,2434.57 2599.57,2434.57 2645,2480 U3.2
NetR9_2: R9.2 U5.1 | length 127.3
  Top Layer w10: R9.2 3025.43,1939.57 3051.14,1913.86 U5.1
NetR12_2: R12.2 U6.1 | length 120.5
  Top Layer w10: R12.2 4587.32,3314.57 U6.1
NetR13_2: R13.2 RX.1 | length 264.7
  Bottom Layer w10: v1(3050,3010) 3050,3085 3170,3205 v1(3190,3205)
NetR14_2: R14.2 TX.1 | length 132.1
  Top Layer w20: TX.1 2995.05,3155.05 R14.2
NetR15_2: R15.2 U1.3 | length 106
  Top Layer w10: R15.2 3501.42,3134.02 U1.3
NetR16_2: R16.2 U1.2 | length 137
  Top Layer w10: R16.2 3490.43,3244.57 3550,3185 3590.91,3185 U1.2
NetR18_2: R18.2 U8.4 | length 293.5
  Top Layer w7: R18.2 3210.93,2434.5 3169.44,2434.5 3139.47,2464.47 3175.44,2500.44 3266.73,2500.44 U8.4
NetR19_2: R19.2 U15.2 | length 669.4
  Top Layer w10: R19.2 5760,2520 5800,2480 5800,2125.81 U15.2
NetR22_2: R22.2 U17.2 | length 892.6
  Top Layer w10: U17.2 5424.6,1800.87 5474.31,1850.58 5474.31,1879.31 5760,2165 5760,2345 5725,2380 R22.2
NetU5_2: U5.2 U5.4 | length 124.2
  Top Layer w10: U5.2 3132.2,1872.8 3167.8,1872.8 3183.39,1888.39 U5.4
NetU5_5: U5.5 U5.8 | length 241.7
  Top Layer w10: U5.8 3106.61,2073.39 3130,2050 3160,2050 3183.39,2073.39 U5.5
NetU6_2: U6.2 U6.4 | length 172.3
  Top Layer w10: U6.2 4622.2,3377.2 4640,3395 4655,3395 4673.39,3376.61 U6.4
NetU6_5: U6.5 U6.8 | length 238.7
  Top Layer w10: U6.8 4596.61,3483.39 4620,3460 4645,3460 4673.39,3488.39 U6.5
NetU8_2: U8.2 work.1 | length 509.2
  Top Layer w10: work.1 3064.94,2859.94 v1(3065,2860) v1@3055.11,2860 ; v1(3230,2770) 3270,2770 3295,2745 v1(3295,2710)
  Bottom Layer w10: v1(3065,2860) 3140,2860 v1(3230,2770) ; v1(3266.73,2605) 3266.73,2656.73 3295,2685 v1(3295,2710)
NetU9_2: U9.2 U12.1 | length 1326.5
  Bottom Layer w10: U9.2@5619.6,4054.6 5670.4,4054.6 5740,3985 5740,3935 5806.13,3868.87 5806.13,3787.93 5875.72,3718.34 5875.72,3615.51 5934.05,3557.18 5934.05,3455.95 5968.22,3421.78 5968.22,3405.95 5970,3404.17 5970,3304.24 5994.24,3280 5994.24,3273.89 5995,3273.13 5995,3112.13 6017.13,3090 6017.13,3007.13 5975,2965 U12.1
NetU11_2: U11.2 U14.1 | length 1809.7
  Top Layer w10: U11.2 5553.44,4130 5610,4130 5704.56,4035.44 5704.56,4008.36 5745,3967.92 5745,3911.6 5810,3846.6 5810,3775 5875,3710 5875,3610 5930,3555 5930,3408.58 5980,3358.58 5980,3247.15 6005,3222.15 6005,3050 5970,3015 5704.7,3015 5649.7,2960 U14.1
NetU12_2: U12.2 U15.1 | length 1137.8
  Bottom Layer w10: U15.1 5760,2090 5815,2145 5815,2235 5880,2300 5880,2480 5960,2560 5960,2845 5851.57,2953.43 U12.2
NetU14_2: U14.2 U17.1 | length 1530.8
  Bottom Layer w10: U17.1 5355,1980 5545,2170 5725,2170 5840,2285 5840,2715 5708.43,2846.57 U14.2
RESET: C9.2 P2.5 R0.1 RESET.2 U.29 | length 3047.2
  Top Layer w10: C9.2 4015,3205 4107,3297 4312,3297 v1(4420,3405) ; P2.5 4571.85,2460 4750,2460 4855,2565 v1(4855,2645) ; v1(4830,3525) 4830.75,3524.25 U.29 ; R0.1 4855.43,2650 RESET.2
  Bottom Layer w10: v1(4420,3405) 4420,3407.25 4468.82,3358.43 4506.27,3358.43 4522.84,3375 4605,3375 4755,3525 v1(4830,3525) 4830,3545 4872,3587 5006.18,3587 5060,3533.18 5060,3315 4790,3045 4790,2710 v1(4855,2645)
RST: U19.11 U.8 | length 1266.4
  Top Layer w10: v1(5025,2345) 5025,2385 5075,2435 v1(5075,2600) ; v1@5140,3065 5140,3265 5175,3300 5175,3310 5175.24,3310.24 U.8
  Bottom Layer w10: U19.11 5024.21,2344.21 v1(5025,2345) ; v1(5075,2600) 5077,2598 5166.43,2598 ; v1(5130,3070) 5170,3030 5170,2832 5166.43,2828.43 5166.43,2600
STDBY: CHRG_OVER.2 U3.6 U.7 | length 5134
  Top Layer w10: v1(2755.05,2910.06) 2755.05,2833.88 2810.44,2778.49 2810.44,2763.94 2894.39,2680 2894.39,2619.39 2865,2590 v1(2845,2590) ; U.7 5143.74,3306.26 5145,3307.52 v1(5145,3315)
  Bottom Layer w10: v1(2755.05,2910.06) 2644.94,2910.06 2370,3185 2370,3588.73 2903.27,4122 4693,4122 5145,3670 v1(5145,3315) ; v1(2845,2590) 2935,2500 2935,2455 v1(2910,2430)
UD+: J0.3 U1.5 | length 1484.8
  Top Layer w10: J0.3 2810,2065 v1@2880,2065 ; v1(3500,2920) 3515,2935 3515,3015 3534.02,3034.02 U1.5
  Bottom Layer w10: v1(2885,2065) 2885,2068.18 2894.82,2078 2896.18,2078 2912,2093.82 2912,2104.77 3230,2422.77 3230,2685 3380,2835 3425,2835 3500,2910 v1(3500,2920)
UD-: J0.2 U1.6 | length 1437.8
  Top Layer w10: J0.2 2732.76,2021.5 2732.76,2027.14 2737.62,2032 2752,2032 2820,2100 v1@2880,2100 ; v1(3425,2880) 3510,2880 3536.58,2906.58 3536.58,2947.3 3573.3,2984.02 U1.6
  Bottom Layer w10: v1(2885,2105) 2888.18,2105 3212,2428.82 3212,2697 3395,2880 v1(3425,2880)
USB_5V: C15.1 C26.2 J0.1 R3.1 U3.4 U8.1 | length 1729
  Top Layer w20: 2695,2030 2697.63,2030 2726.13,2058.5 2730.39,2058.5 J0.1
  Top Layer w30: C15.1 2667.28,2284.57 ; U3.4 2677.72,2295 2667.28,2284.57 ; J0.1@2730.94,2059.06 2815.43,2143.55 ; U8.1 3234.57,2655 v1(3185,2605.43) 3170.43,2605.43 3095,2530 3095,2475 3065,2445 3065,2292.27 2916.28,2143.55 2815.43,2143.55 ; 2667.28,2284.57 2671.85,2280 2737,2280 2815.43,2201.57 2815.43,2143.55
  Bottom Layer w30: v1(2850.43,2650) 3140.43,2650 v1(3185,2605.43)
XI: U1.7
XO: U1.8
pads on no net: BT1.0 BT2.0 J0.0 J0.4 M1.3 M1.4 M2.3 M2.4 SW1.1 SW1.6 T1.1 T1.2 U1.9 U1.10 U1.11 U1.12 U1.14 U1.15 U3.9 U4.4 U7.6 U8.9 U19.3 U19.4 U19.5 U19.6 U19.7 U19.8 U19.9 U19.10 U19.14 U19.15 U19.16 U19.17 U19.18 U19.19 U19.20 U19.21 U19.22 U19.23 U19.24 U19.25 U19.26 U20.3
copper on no net:
  other v2: 2763.35,2411.69 2806.65,2411.69 2763.35,2455 2806.65,2455 2763.35,2498.31 2806.65,2498.31 3331.69,2515.04 3375,2515.04 3418.31,2515.04 3331.69,2558.35 3375,2558.35 3418.31,2558.35 3331.69,2601.65 3375,2601.65 3418.31,2601.65 3331.69,2644.96 3375,2644.96 3418.31,2644.96

## Polygon pours and split planes (outlines as drawn)
GND on Top Layer "Top Layer-GND" (solid, pour order 6): 3018.55,3535 3115,3535 3325,3745 3325,3820 3320,3825 3240,3825
GND on Top Layer "Top Layer-GND 1" (solid, pour order 8): 2747.5,3587.5 3062.5,3587.5 3115,3535 3085,3505 3005,3505 2770.25,3505 2684.54,3587.5 2735,3575
GND on Bottom Layer "GND" (solid, pour order 12): 3240,4075 3240,4050 3330,3960 3330,3730 3200,3600 3055,3455 2960,3360 2933.5,2676.5 2710,2900 2480,3130 2340,3360 2395,3415 2480,3500 2480,3800 2480,3840 2710,4070

## Keep-outs
Keep-Out Layer:
  lines w10: 3224.32,4702.32 ccw(c4111,2991) 3225.13,1279.26 ; 3225,1279 3225,1822.67 4997,1822.67 4997,1279.69 ccw(c4110.28,2991) 4996.57,4702.53 ; 3225,4701 3225,4161 4997,4161 4997,4702.53 ; 16995,-4 17095,-4 ; 17035,-24 17095,-4 ; 17035,16 17095,-4 ; 17085,-4 17185,-4 ; 17125,-24 17185,-4 ; 17125,16 17185,-4 ; 17155,-24 17095,-4 ; 17155,16 17095,-4 ; 17195,-4 17095,-4 ; 17245,-24 17185,-4 ; 17245,16 17185,-4 ; 17285,-4 17185,-4 ; 17095,-14 17095,6 17095,-14 ; 17185,-14 17185,6 17185,-14
  text "0 (mil)" at 16914.06,-147.96 h60
  text "0 (mil)" at 17004.06,-147.96 h60

## Other copper
Top Layer:
  rectangle net GND: 2800,2360 2830,2400
  rectangle net GND: 2713.59,2415 2755,2445
  rectangle net GND: 2713.59,2498.31 2763.35,2543.93
  rectangle net BOOST_6V: 2615,3690 2760,3870
  rectangle net BAT_4.2V: 3070,3775 3165,3935
  rectangle net GND: 2610,3575 2770,3665
  rectangle net BAT_4.2V: 3120,3840 3330,3935
  rectangle net BAT_4.2V: 3195,3895 3330,4070
  rectangle net NetD4_2: 2820,3695 2935,3930
  region net GND: 2948.79,3563.79 2970,3585 2942.32,3612.68 2921.11,3591.46
  pour cut-out: 5613,2199 6075,2199 6094,2180 6112,2198 6112,2838 5648,2838 5623,2863
  text "huabuduo" at 2850,4185 h30

## Silkscreen, mask and mechanical layers (free items; w line width, h text height)
Top Overlay:
  circle w10: c2850,3000 r246.27
  lines w7.87: 2788,3006 2913,3006 ; 2849,2947 2849,3072
  text "VCC" at 4465,3132 h30 r270
  text "VCC" at 5210,3105 h30 r90
  text "GND" at 4470,3025 h30 r270
  text "GND" at 5210,3005 h30 r90
  text "充电" at 2575,2970 h50 r90
  text "SCL" at 4470,2928 h30 r270
  text "OUT" at 5210,2900 h30 r90
  text "工作中" at 3090,2870 h50 r225
  text "SDA" at 4477,2831 h30 r270
  text "充电结束" at 2715,2765 h50 r135
  text "充电" at 2895,2740 h50 r180
  text "MISO" at 4700,2560 h30
  text "VCC" at 4825,2560 h30
  text "SCK" at 4695,2515 h30
  text "MOSI" at 4830,2510 h30
  text "REST" at 4695,2460 h30
  text "GND" at 4830,2460 h30
  text "短接后一节电池供电" at 3044,2330 h50
  text "SDA" at 4639,2056 h30
  text "SCL" at 4745,2056 h30
  text "GND" at 4844,2056 h30
  text "VCC" at 4503,2052 h30
Top Paste:
  text "huabuduo" at 2850,4185 h30

## Text inside footprints (layer, text, board x,y; h text height)
BT1: Bottom Overlay "+" at 3285,3905 h59.06 r90; Bottom Overlay "电池盒" at 3182.98,1969 h69.37
BT2: Bottom Overlay "电池盒" at 5087.02,4006 h69.37 r180; Bottom Overlay "+" at 4985,2070 h59.06 r270
M1: Bottom Overlay "MOTOR" at 4127,1929 h59.06 r180
M2: Bottom Overlay "MOTOR" at 4095,4043 h59.06